# Altium PCB 24.063_24.069_HEAT.PcbDoc
Units mm, origin at the board's own origin, x right, y up, seen from the top; angles counter-clockwise.
Board outline 64 x 64 mm, 2 copper layers (Top Layer, Bottom Layer); 3 components, 2 nets, 19 pads, 0 vias.
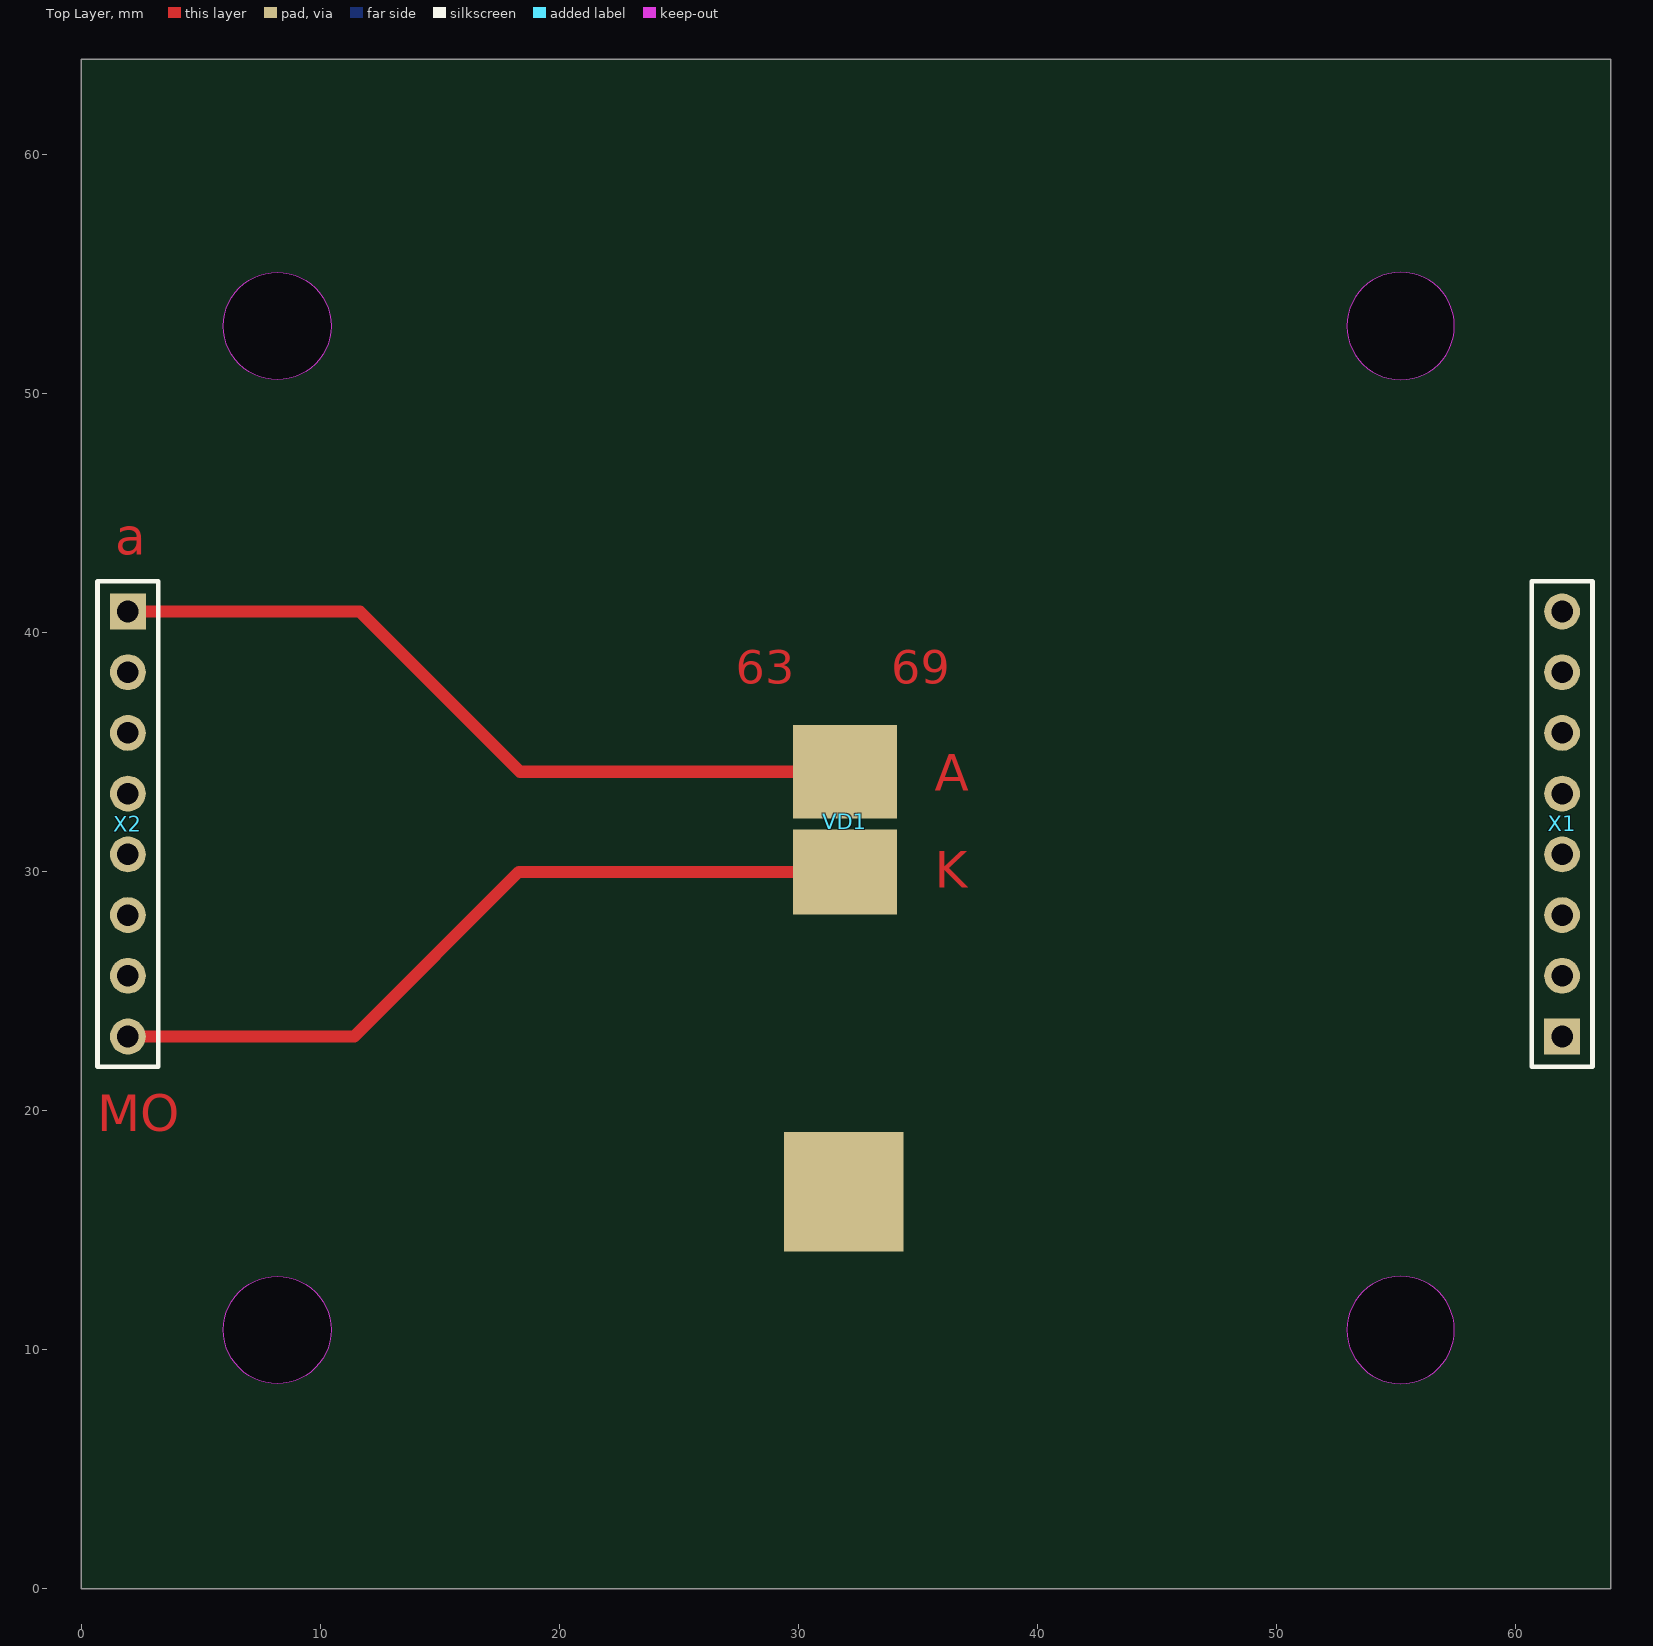
[diagram p0: Top Layer view]
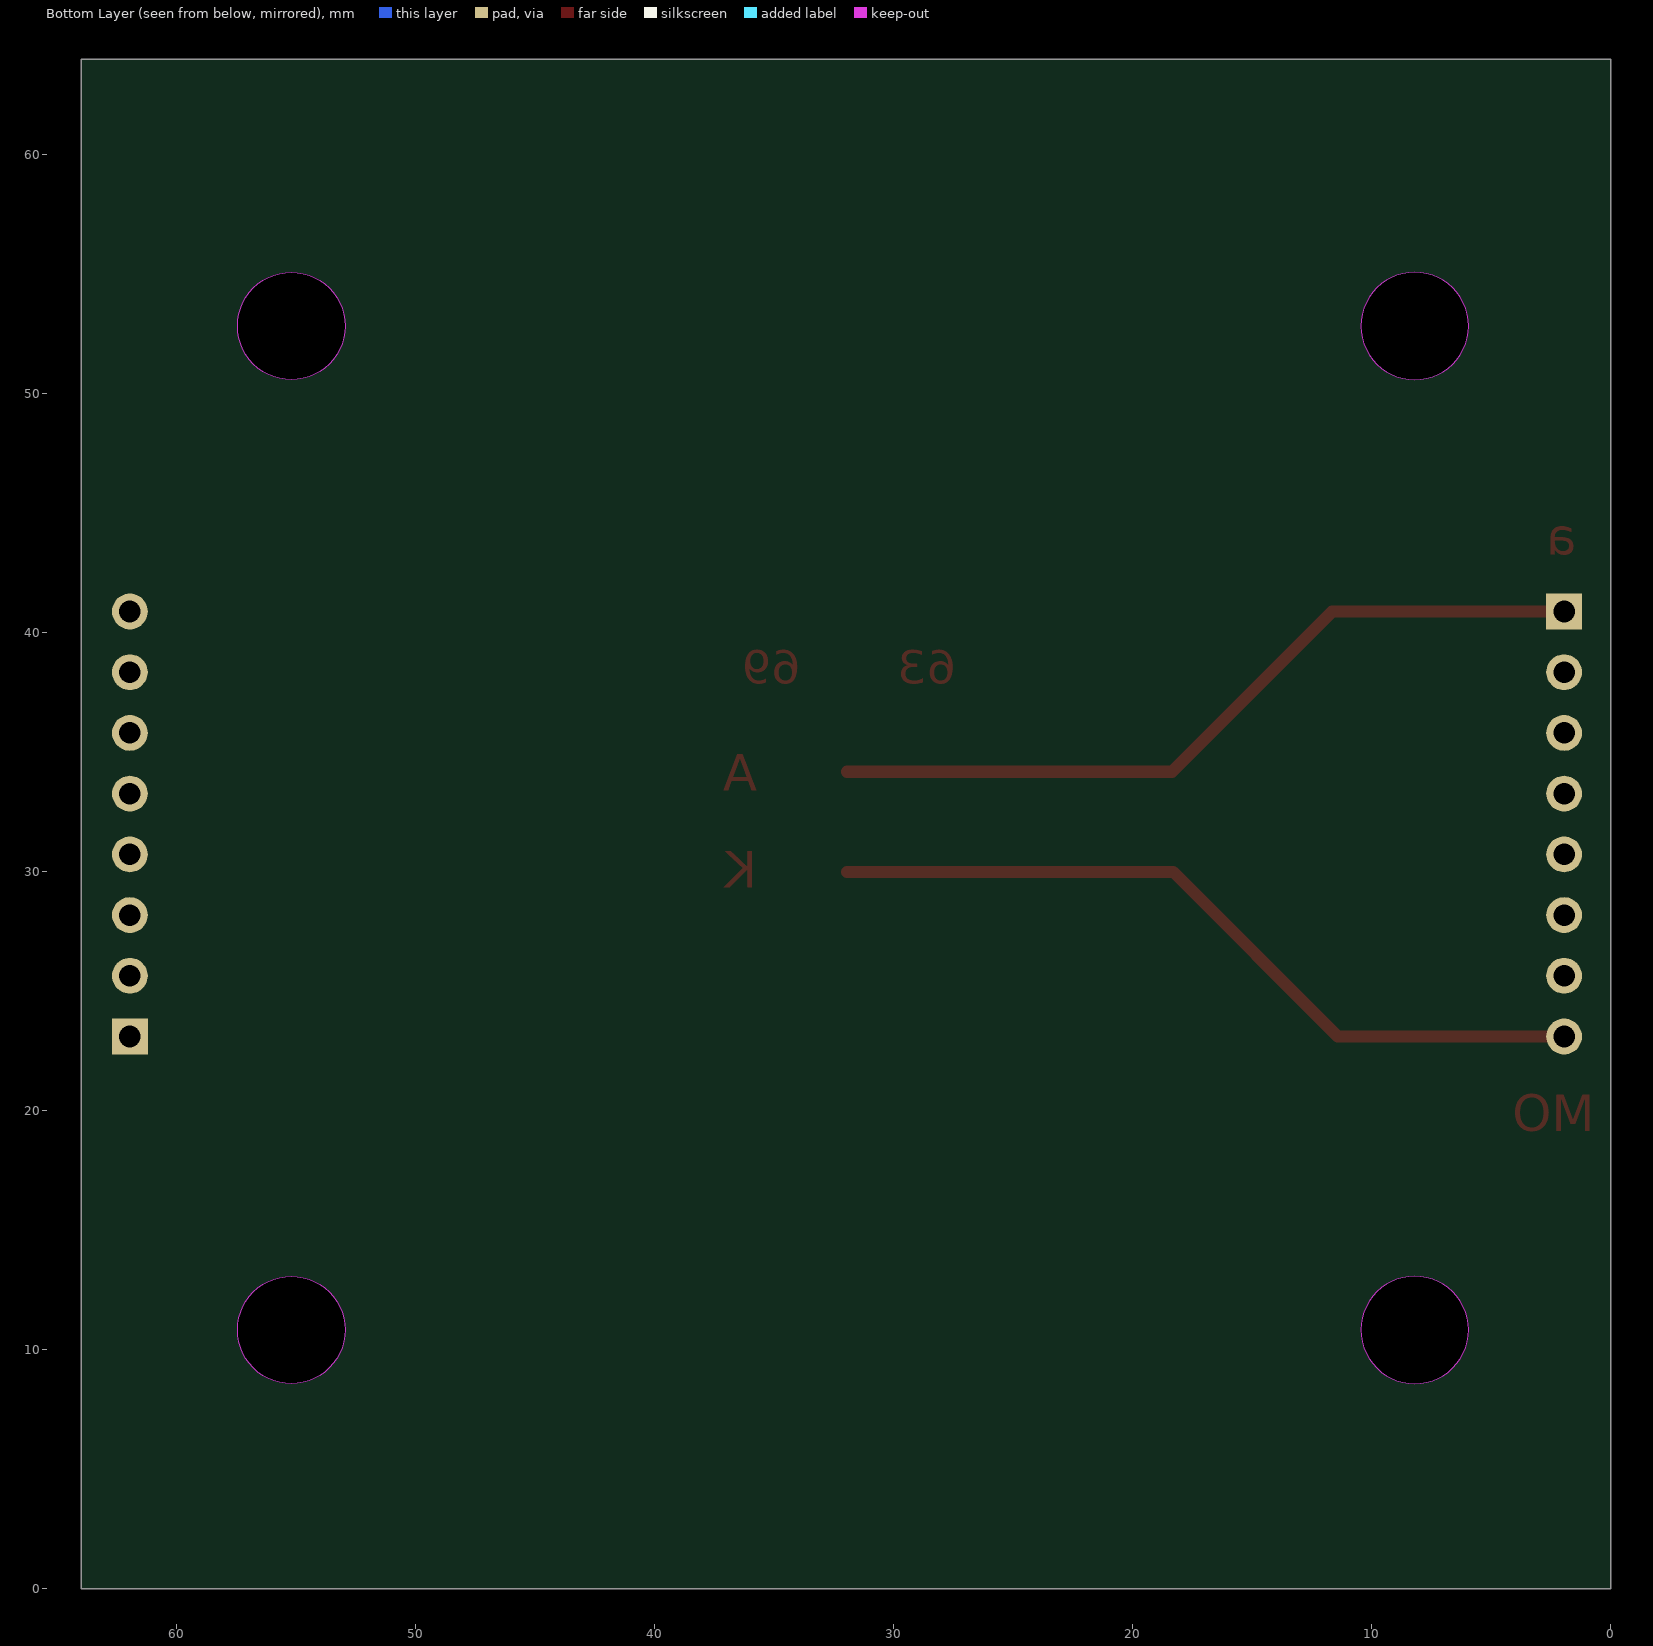
[diagram p1: Bottom Layer view, seen from below]

## Layer stack, top to bottom
Top Solder: solder mask 0.0102, Solder Resist, Dk 3.5
Top Layer: signal copper 0.0356
Dielectric 1: dielectric 0.32, FR-4, Dk 4.8
Bottom Layer: signal copper 0.0356
Bottom Solder: solder mask 0.0102, Solder Resist, Dk 3.5

## Board outline
0,0 64,0 64,64 0,64
cut-out: 8.206,8.583 cw(c8.206,10.833) 5.956,10.833 cw(c8.206,10.833) 8.206,13.083 cw(c8.206,10.833) 10.456,10.833 cw(c8.206,10.833)
cut-out: 52.956,10.833 ccw(c55.206,10.833) 55.206,8.583 ccw(c55.206,10.833) 57.456,10.833 ccw(c55.206,10.833) 55.206,13.083 ccw(c55.206,10.833)
cut-out: 52.956,52.833 ccw(c55.206,52.833) 55.206,50.583 ccw(c55.206,52.833) 57.456,52.833 ccw(c55.206,52.833) 55.206,55.083 ccw(c55.206,52.833)
cut-out: 8.206,50.583 cw(c8.206,52.833) 5.956,52.833 cw(c8.206,52.833) 8.206,55.083 cw(c8.206,52.833) 10.456,52.833 cw(c8.206,52.833)

## Design rules (kind name [scope] priority, off if disabled: settings)
Clearance [All] p1: gap=0.254 ignorepadtopadclearanceinfootprint=FALSE except(0: Arc-Hole Track-Hole SMDPad-Hole THPad-Hole Via-Hole Fill-Hole Poly-Hole Region-Hole Text-Hole)
PolygonConnect [All] p1: connectstyle=Relief reliefconductorwidth=0.254 reliefentries=4 polygonreliefangle="90 Angle" airgapwidth=0.254
RoutingVias [All] p1: holewidth=0.711 width=1.27 viastyle="Through Hole" minholewidth=0.711 minwidth=1.27 maxholewidth=0.711 maxwidth=1.27
SolderMaskExpansion [All] p1: expansion=0.102
Width [All] p1: maxlimit=0.508 minlimit=0.254 preferedwidth=0.254 minimp=50.000000 maximp=50.000000 favimp=50.000000
30 further rules are at their usual default settings.

## Components (designator, comment, footprint, x,y, rotation, side; value= is the part's Value field where it differs from the comment)
VD1 "LED" "LED 24.069" 31.928,29.997 r90 top
X1 "Header 8" HDR1X8 61.957,23.11 r90 top
X2 "Header 8" HDR1X8 1.957,40.89 r270 top

## Footprints (in the part's own frame and the unit in brackets; to place one, negate y for a bottom-side part, rotate by r counter-clockwise, add the part's x,y. Pads: shape width x height; smd on the part's side, far side on the other; paste and mask are expansions set on the pad)
HDR1X8 [mm] "Connector; Header; 8 Position"
  rect 1.5x1.5 hole 0.9: 1(0,0)
  round 1.5 hole 0.9: 2(2.54,0) 3(5.08,0) 4(7.62,0) 5(10.16,0) 6(12.7,0) 7(15.24,0) 8(17.78,0)
  silkscreen extent -1.27,-1.27 19.05,1.27
"LED 24.069" [mm]
  rect 3.55x4.36 smd: 1(0,-0.026)
  rect 3.9x4.36 smd: 2(4.191,-0.026)

## Part data
X1 X2: "Header, 8-Pin", LatestRevisionDate=17-Jul-2002, LatestRevisionNote="Re-released for DXP Platform.", Publisher="Altium Limited"

## Free pads (board coordinates)
  rect 5x5 smd: 0(31.902,16.617)

## Nets (pads, with @x,y where several pads share a name; then routed paths per layer and width w, separated by ;. In a path a pad name is that pad's centre, name@x,y a point inside that pad or via, vN(x,y) a via of type N, cw(c..) or ccw(c..) an arc to the next point about the centre after c; other vN are vias at no path point)
\M\O\: VD1.1 X2.8 | length 32.8
  Top Layer w0.508: X2.8 11.426,23.11 18.313,29.997 VD1.1
a: VD1.2 X2.1 | length 32.8
  Top Layer w0.508: X2.1 11.663,40.89 18.364,34.188 VD1.2
pads on no net: X1.1 X1.2 X1.3 X1.4 X1.5 X1.6 X1.7 X1.8 X2.2 X2.3 X2.4 X2.5 X2.6 X2.7

## Other copper
Top Layer:
  text "a" at 1.429,43.254 h1.52
  text "63" at 27.381,37.877 h1.4
  text "69" at 33.884,37.877 h1.4
  text "A" at 35.712,33.401 h1.52
  text "K" at 35.712,29.337 h1.52
  text "MO" at 0.679,19.144 h1.52

## Silkscreen, mask and mechanical layers (free items; w line width, h text height)
Mechanical 1:
  circle w0.254: c8.206,52.833 r2.25
  circle w0.254: c55.206,52.833 r2.25
  circle w0.254: c8.206,10.833 r2.25
  circle w0.254: c55.206,10.833 r2.25
  lines w0.254: 0,0 64,0 64,64 0,64 0,0